# Altium PCB 56PCB-主板.pcbdoc
Units mm, origin at the board's own origin, x right, y up, seen from the top; angles counter-clockwise.
Board outline 72.36 x 47.63 mm, 2 copper layers (Top Layer, Bottom Layer); 82 components, 0 nets, 334 pads, 154 vias.
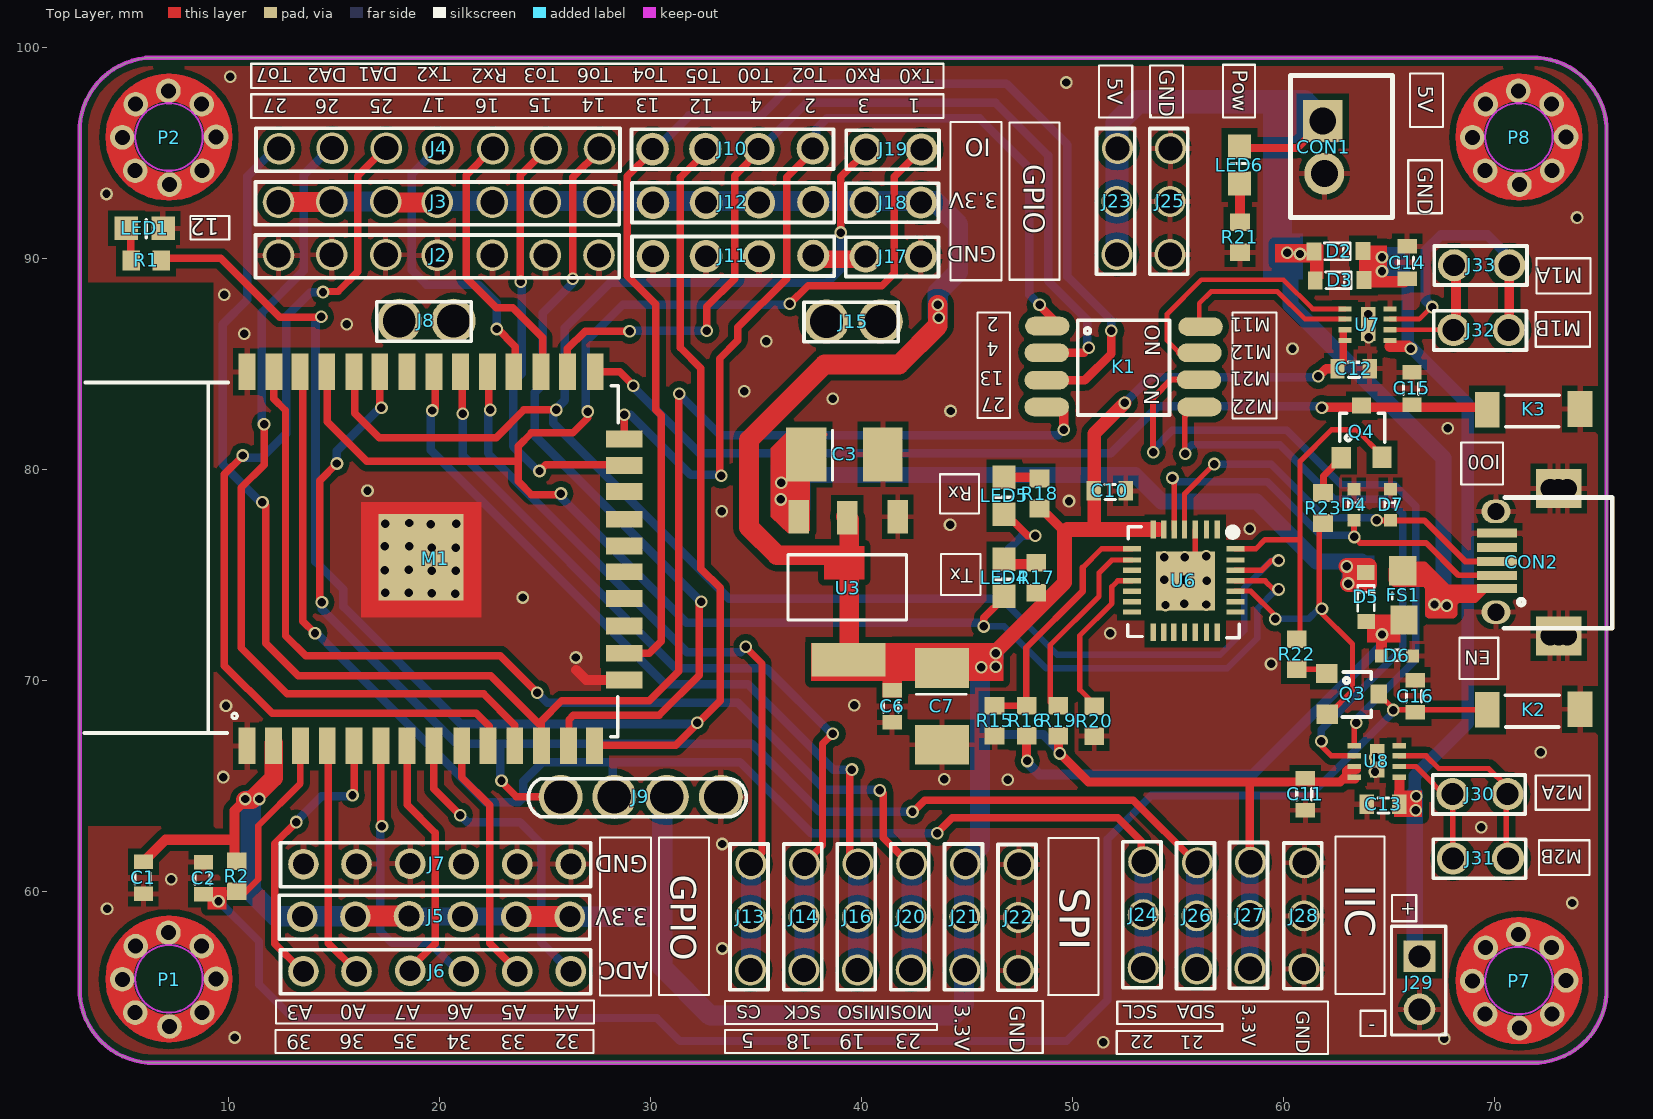
[diagram p0: Top Layer view]
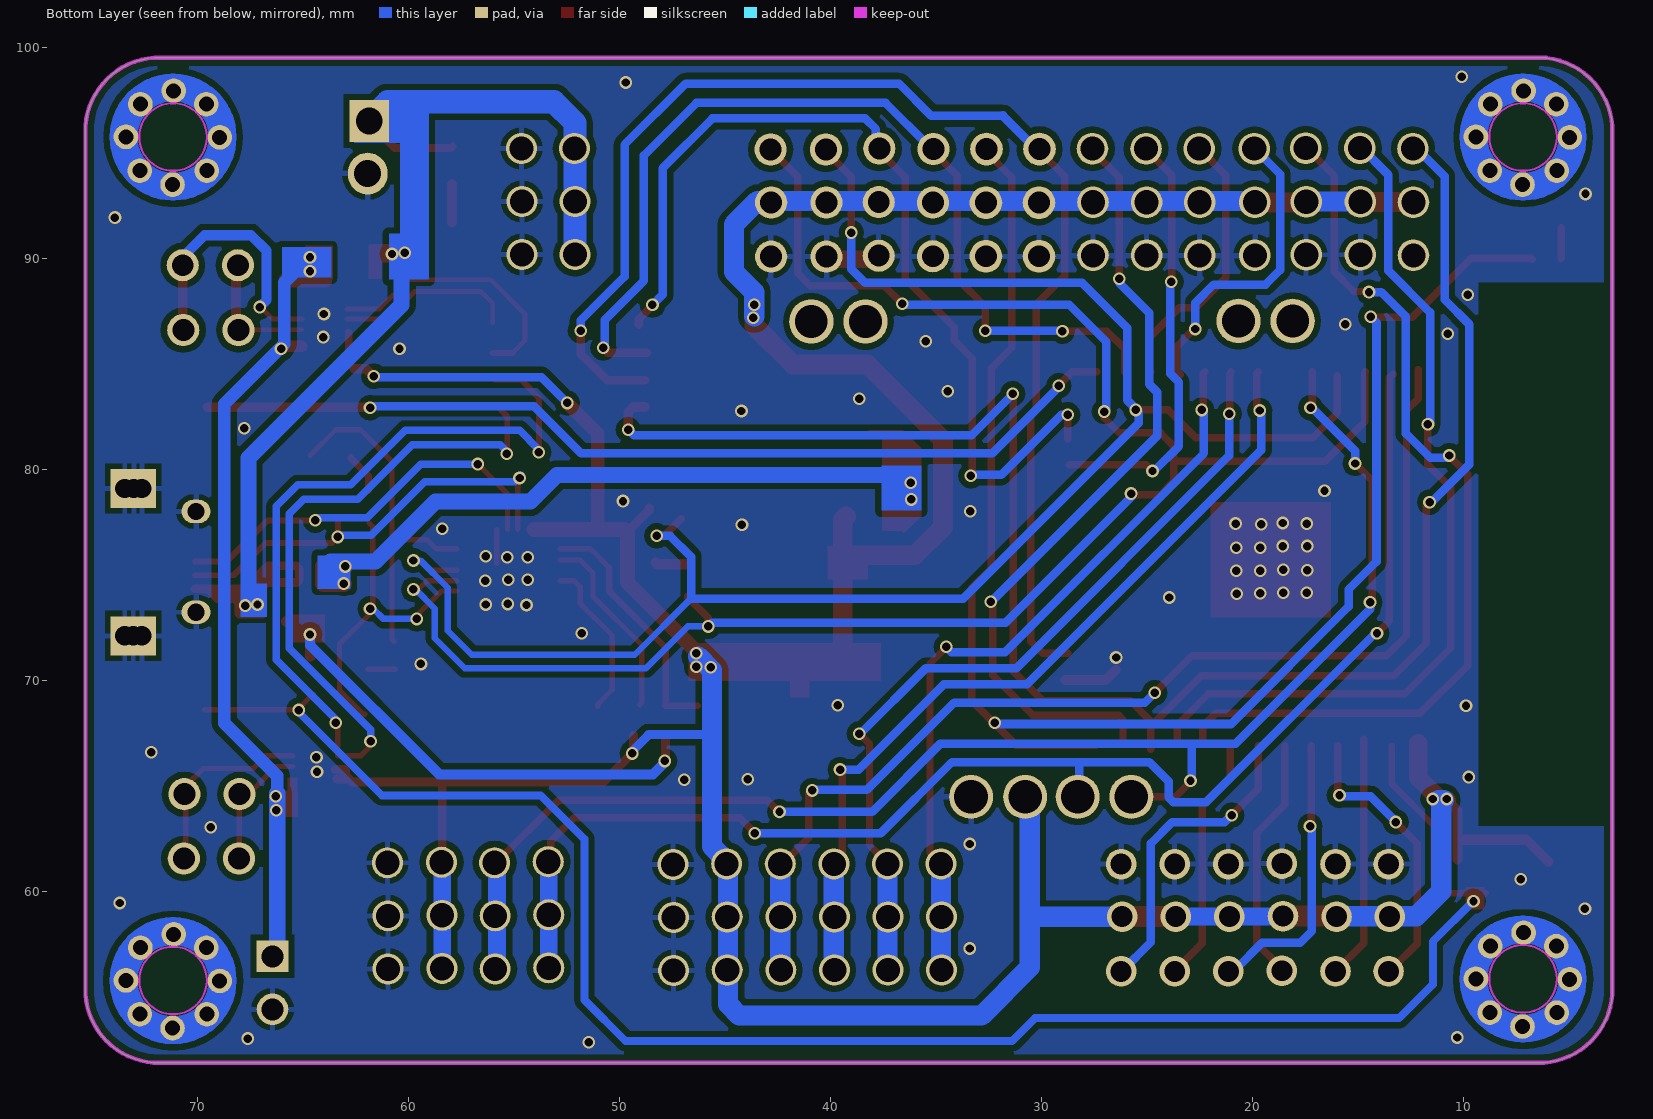
[diagram p1: Bottom Layer view, seen from below]

## Layer stack, top to bottom
Top Layer: signal copper 0.0356
Dielectric: dielectric 0.32, FR-4, Dk 4.8
Bottom Layer: signal copper 0.0356

## Board outline
2.95,55.111 2.95,96.285 2.95,96.288 cw(c6.429,96.031) 6.058,99.5 6.075,99.517 72.034,99.517 72.055,99.513 cw(c71.834,96.031) 75.313,96.288 75.313,96.285 75.313,55.112 75.313,55.108 cw(c71.834,55.365) 72.092,51.886 72.088,51.886 6.683,51.886 6.175,51.886 6.171,51.886 cw(c6.429,55.365)

## Design rules (kind name [scope] priority, off if disabled: settings)
Clearance [All] p1: gap=0.254
FanoutControl Fanout_Default [All] p1: bgadir=Out bgaviamode=Centered fanoutstyle=Auto fanoutdirection=Alternating viagrid=0.025 // Fanout_Default (Default Rule)
FanoutControl Fanout_Small [(CompPinCount < 5)] p2: bgadir=Out bgaviamode=Centered fanoutstyle=Auto fanoutdirection=OutThenIn viagrid=0.025 // Fanout_Small (Default Rule)
FanoutControl Fanout_LCC [IsLCC] p4: bgadir=Out bgaviamode=Centered fanoutstyle=Auto fanoutdirection=Alternating viagrid=0.025 // Fanout_LCC (Default Rule)
FanoutControl Fanout_BGA [IsBGA] p5: bgadir=Out bgaviamode=Centered fanoutstyle=Auto fanoutdirection=Alternating viagrid=0.025 // Fanout_BGA (Default Rule)
PolygonConnect [All] p1: connectstyle=Relief reliefconductorwidth=0.254 reliefentries=4 polygonreliefangle="90 Angle" airgapwidth=0.254
RoutingVias [All] p1: holewidth=0.711 width=1.27 viastyle="Through Hole" minholewidth=0.711 minwidth=1.27 maxholewidth=0.711 maxwidth=1.27
SolderMaskExpansion [All] p1: expansion=0.102
Width [All] p1: maxlimit=0.254 minlimit=0.254 preferedwidth=0.254
24 further rules are at their usual default settings.

## Components (designator, comment, footprint, x,y, rotation, side; value= is the part's Value field where it differs from the comment)
C1 "104" COMPONENT_13 5.972,60.649 r90 top
C2 "104" COMPONENT_13 8.817,60.623 r90 top
C3 "100UF/10V" COMPONENT_17 39.195,80.715 r180 top
C6 "104" COMPONENT_13 41.456,68.777 r90 top
C7 "100UF/10V" COMPONENT_17 43.818,68.777 r90 top
C10 "104" COMPONENT_13 51.768,78.987 r180 top
C11 "104" COMPONENT_13 61.039,64.611 r90 top
C12 "104" COMPONENT_13 63.325,84.779 r180 top
C13 "104" COMPONENT_13 64.722,64.128 r180 top
C14 "104" COMPONENT_13 65.865,89.808 r90 top
C15 "104" COMPONENT_13 66.094,83.839 r90 top
C16 "104" COMPONENT_13 66.246,69.259 r90 top
CON1 "XH2.54MM*2P直针插座" COMPONENT_24 61.903,95.269 r90 top
CON2 "安卓尾插牛角5针USB插座" COMPONENT_25 71.656,75.609 r90 top
D2 "S4" COMPONENT_21 62.614,90.341 r0 top
D3 "S4" COMPONENT_21 62.665,88.97 r0 top
D4 "NC" COMPONENT_22 63.35,78.327 r90 top
D5 "S4" COMPONENT_21 63.909,73.958 r90 top
D6 "NC" COMPONENT_22 65.382,71.164 r0 top
D7 "NC" COMPONENT_22 65.078,78.327 r90 top
FS1 "FS" COMPONENT_23 65.687,74.034 r90 top
J2 "2.54排针13P黑色" COMPONENT_4 19.967,90.163 r90 top
J3 "2.54排针13P红色" COMPONENT_4 19.967,92.678 r90 top
J4 "2.54排针13P黄色" COMPONENT_4 19.993,95.218 r90 top
J5 "2.54排针6P红色" COMPONENT_1 19.84,58.82 r90 top
J6 "2.54排针6P蓝色" COMPONENT_1 19.891,56.229 r90 top
J7 "2.54排针6P黑色" COMPONENT_1 19.891,61.309 r90 top
J8 "2P圆孔排母DS18B20" COMPONENT_5 19.383,87.039 r90 top
J9 "4P圆孔排母DS18B20" COMPONENT_2 29.543,64.484 r90 top
J10 "NC" COMPONENT_6 33.886,95.193 r90 top
J11 "NC" COMPONENT_6 33.912,90.113 r90 top
J12 "NC" COMPONENT_6 33.912,92.653 r90 top
J13 "2.54排针3P白色" COMPONENT_3 34.75,58.794 r90 top
J14 "2.54排针3P绿色" COMPONENT_3 37.29,58.794 r90 top
J15 "2P圆孔排母DS18B20" COMPONENT_5 39.627,87.014 r90 top
J16 "2.54排针3P蓝色" COMPONENT_3 39.83,58.794 r90 top
J17 "NC" COMPONENT_7 41.506,90.087 r90 top
J18 "NC" COMPONENT_7 41.506,92.653 r90 top
J19 "NC" COMPONENT_7 41.532,95.167 r90 top
J20 "2.54排针3P黄色" COMPONENT_3 42.37,58.794 r90 top
J21 "2.54排针3P红色" COMPONENT_3 44.91,58.794 r90 top
J22 "2.54排针3P黑色" COMPONENT_3 47.45,58.769 r90 top
J23 "2.54排针3P红色" COMPONENT_3 52.124,92.703 r90 top
J24 "2.54排针3P蓝色" COMPONENT_3 53.368,58.896 r90 top
J25 "2.54排针3P黑色" COMPONENT_3 54.638,92.703 r90 top
J26 "2.54排针3P黄色" COMPONENT_3 55.908,58.845 r90 top
J27 "2.54排针3P红色" COMPONENT_3 58.423,58.871 r90 top
J28 "2.54排针3P黑色" COMPONENT_3 60.988,58.845 r90 top
J29 "NC" COMPONENT_8 66.449,55.67 r90 top
J30 "2.54排针2P蓝色" COMPONENT_7 69.319,64.611 r90 top
J31 "2.54排针2P黄色" COMPONENT_7 69.345,61.563 r90 top
J32 "2.54排针2P黄色" COMPONENT_7 69.37,86.607 r90 top
J33 "2.54排针2P蓝色" COMPONENT_7 69.396,89.681 r90 top
K1 "贴片拨码开关（4位，1.25mm脚间距）" COMPONENT_18 52.428,84.88 r90 top
K2 "3*4*2MM按键按钮 2脚" COMPONENT_19 71.859,68.624 r90 top
K3 "3*4*2MM按键按钮 2脚" COMPONENT_19 71.859,82.848 r90 top
LED1 "LED蓝" COMPONENT_11 6.023,91.433 r90 top
LED4 "LED蓝" COMPONENT_11 46.764,74.873 r0 top
LED5 "LED蓝" COMPONENT_11 46.764,78.759 r0 top
LED6 "LED蓝" COMPONENT_11 57.915,94.431 r180 top
M1 "ESP32-WROOM-32DC （WIFI&蓝牙模块）" COMPONENT_9 20.043,75.762 r90 top
P1 "NC" COMPONENT_26 7.191,55.823 r90 top
P2 "NC" COMPONENT_26 7.191,95.726 r90 top
P7 "NC" COMPONENT_26 71.174,55.746 r90 top
P8 "NC" COMPONENT_26 71.174,95.726 r90 top
Q3 "Y1" COMPONENT_20 63.223,69.361 r90 top
Q4 "Y1" COMPONENT_20 63.706,81.731 r180 top
R1 "510R" COMPONENT_10 6.099,89.909 r90 top
R2 "100K" COMPONENT_10 10.391,60.725 r180 top
R15 "47K5" COMPONENT_10 46.307,68.091 r180 top
R16 "22K1" COMPONENT_10 47.831,68.091 r180 top
R17 "510R" COMPONENT_10 48.288,74.873 r180 top
R18 "510R" COMPONENT_10 48.441,78.86 r180 top
R19 "2K" COMPONENT_10 49.33,68.091 r180 top
R20 "10K" COMPONENT_10 51.031,68.065 r180 top
R21 "1K" COMPONENT_10 57.94,91.002 r180 top
R22 "10K" COMPONENT_10 60.633,71.24 r180 top
R23 "10K" COMPONENT_10 61.877,78.175 r180 top
U3 "AMS1117-3.3V" COMPONENT_14 39.373,74.365 r90 top
U6 "CP2102-GMR 贴片QFN-28" COMPONENT_15 55.273,74.72 r90 top
U7 "DRV8837DSGR" COMPONENT_16 63.985,86.861 r90 top
U8 "DRV8837DSGR" COMPONENT_16 64.417,66.16 r90 top

## Footprints (in the part's own frame and the unit in brackets; to place one, negate y for a bottom-side part, rotate by r counter-clockwise, add the part's x,y. Pads: shape width x height; smd on the part's side, far side on the other; paste and mask are expansions set on the pad)
COMPONENT_1 [mil]
  round 57.11 hole 39: 1(-0.5,-249.5) 2(-0.5,-149.5) 3(-0.5,-49.5) 4(0.5,50.5) 5(-0.5,150.5) 6(-0.5,249.5)
  silkscreen extent -43,-286 40,292
COMPONENT_2 [mil]
  round 82.11 hole 63: 1(0,149.5) 2(0,49.5) 3(0,-48.5) 4(0,-149.5)
  silkscreen extent -37,-197 34,210
COMPONENT_3 [mil]
  round 58 hole 45: 1(-99,0.5) 2(0,0.5) 3(99,-0.5)
  silkscreen extent -136,-33 136,39
COMPONENT_4 [mil]
  round 59 hole 45: 1(-0.5,299) 2(0.5,200) 3(0.5,99) 4(-0.5,3) 5(-0.5,-100) 6(-0.5,-199) 7(-0.5,-299)
  silkscreen extent -43,-337 38,342
COMPONENT_5 [mil]
  round 83 hole 61: 1(0,50.5) 2(0,-50.5)
  silkscreen extent -38,-84 36,92
COMPONENT_6 [mil]
  round 61 hole 41: 1(-0.25,149.25) 2(-0.25,50.25)
  round 60 hole 41: 3(-0.25,-48.75) 4(0.75,-149.75)
  silkscreen extent -37,-189 37,188
COMPONENT_7 [mil]
  round 60 hole 41: 1(0,51.5) 2(0,-51.5)
  silkscreen extent -37,-84 36,88
COMPONENT_8 [mil]
  rect 59x59 hole 41: 1(49.5,0)
  round 59 hole 41: 2(-49.5,0)
  silkscreen extent -98,-49 106,52
COMPONENT_9 [mil]
  rect 68x31.5 smd: 1(-349,361.13) 2(-349,311.13) 3(-349,261.13) 4(-349,211.13) 5(-349,161.13) 6(-349,111.13) 7(-349,62.13) 8(-349,12.13) 9(-349,-39.87) 10(-349,-88.87) 11(-349,-138.87) 12(-349,-188.87) 13(-349,-238.87) 14(-349,-287.87) 25(349,-288.87) 26(349,-236.87) 27(349,-187.87) 28(349,-136.87) 29(349,-87.87) 30(349,-37.87) 31(349,12.13) 32(349,62.13) 33(349,113.13) 34(349,161.13) 35(349,212.13) 36(349,262.13) 37(349,310.13) 38(349,361.13)
  rect 31.5x68 smd: 15(-226,-342.87) 16(-176,-342.87) 17(-125,-342.87) 18(-74,-342.87) 19(-24,-342.87) 20(24,-342.87) 21(74,-342.87) 22(126,-342.87) 23(174,-342.87) 24(224,-342.87)
  rect 161x159 smd: 39(3,36.13)
  silkscreen extent -332,-332 329,664
COMPONENT_10 [mil]
  rect 37x33 smd: 1(0,28) 2(0,-28)
COMPONENT_11 [mil]
  rect 43x44 smd: 1(0,34.5) 2(0,-34.5)
  silkscreen extent -18,-3 16,-3
COMPONENT_13 [mil]
  rect 27x36 smd: 1(30,0) 2(-30,0)
  silkscreen extent -11,-12 10,16
COMPONENT_14 [mil]
  rect 62x38 smd: 1(133.75,-92.5) 2(131.75,1.5) 3(133.75,92.5)
  rect 63x138 smd: 4(-133.25,-0.5)
  silkscreen extent -59,-108 63,112
COMPONENT_15 [mil]
  rect 33x10 smd: 1(96,-62.5) 2(96,-42.5) 3(96,-21.5) 4(96,-1.5) 5(96,17.5) 6(96,37.5) 7(96,56.5) 15(-96,56.5) 16(-96,37.5) 17(-96,18.5) 18(-96,-1.5) 19(-96,-21.5) 20(-96,-42.5) 21(-96,-62.5)
  rect 10x33 smd: 8(60,96.5) 9(39,96.5) 10(20,96.5) 11(0,96.5) 12(-19,96.5) 13(-39,96.5) 14(-58,96.5) 22(-58,-96.5) 23(-39,-96.5) 24(-19,-96.5) 25(0,-96.5) 26(20,-96.5) 27(39,-96.5) 28(60,-96.5)
  rect 110.24x110.24 smd: 29(0,-3.5)
  silkscreen extent -106,-104 101,104
COMPONENT_16 [mil]
  rect 9.84x25 smd: 1(29.5,42) 2(10.5,42) 3(-9.5,42) 4(-29.5,42) 5(-29.5,-42) 6(-9.5,-42) 7(10.5,-42) 8(29.5,-42)
  rect 62.84x27 smd: 9(1.5,-1)
COMPONENT_17 [mil]
  rect 74.84x101 smd: 1(71.25,0)
  rect 73.84x101 smd: 2(-71.75,0)
  silkscreen extent 22,-45 22,48
COMPONENT_18 [mil]
  oval 34.84x83 smd: 1(75.5,142.5) 2(25.5,143.5) 3(-25.5,143.5) 4(-75.5,143.5) 5(-75.5,-141.5) 6(-24.5,-140.5) 7(25.5,-141.5) 8(74.5,-143.5)
  silkscreen extent -91,-86 87,86
COMPONENT_19 [mil]
  rect 66.84x46 smd: 1(-0.5,86.5) 2(0.5,-86.5)
  silkscreen extent -32,-48 27,52
COMPONENT_20 [mil]
  rect 35.84x40 smd: 1(38,46) 2(-38,45)
  rect 35.84x30 smd: 3(0,-51)
  silkscreen extent -43,-37 41,17
COMPONENT_21 [mil]
  rect 27.84x33 smd: 1(-45.5,-0.5) 2(45.5,0.5)
  silkscreen extent -26,-16 22,16
COMPONENT_22 [mil]
  rect 23.84x24 smd: 1(-29,0) 2(29,0)
  silkscreen extent -9,-9 10,11
COMPONENT_23 [mil]
  rect 54.84x51 smd: 3(46,1) 4(-46,-1)
  silkscreen extent -8,-19 5,21
COMPONENT_24 [mil]
  rect 77.84x74 hole 50: 1(49,1.5)
  oval 77.84x74 hole 50: 2(-49,-1.5)
  silkscreen extent -131,-128 134,62
COMPONENT_25 [mil]
  rect 16.84x74 smd: 1(-49.5,60.25) 2(-24.5,60.25) 3(1.5,60.25) 4(27.5,60.25) 5(54.5,60.25)
  oval 43.84x54 hole 32: 6(-93.5,62.25) 7(94.5,62.25)
  rect 72.84x53 hole 36: 8(137.5,-38.75) 9(137.5,-70.75) 10(137.5,-53.75) 11(-137.5,-38.75) 12(-137.5,-70.75) 13(-137.5,-54.75)
  silkscreen extent -124,-155 121,47
COMPONENT_26 [mil]
  round 45.84 hole 28: 1(-61.5,63.5) 2(0.5,87.5) 3(62.5,62.5) 4(87.5,1.5) 5(62.5,-60.5) 6(1.5,-87.5) 7(-61.5,-61.5) 8(-87.5,-0.5)
  Top Layer circle w51.94: c1.08,0.5 r92.42
  Bottom Layer circle w51.94: c1.08,0.5 r92.42
  Keep-Out Layer circle w3.94: c1.37,0.5 r63.13

## Via types
v1: diameter 0.6, hole 0.4, Top Layer to Bottom Layer, tented both sides, 154 vias

## Nets (pads, with @x,y where several pads share a name; then routed paths per layer and width w, separated by ;. In a path a pad name is that pad's centre, name@x,y a point inside that pad or via, vN(x,y) a via of type N, cw(c..) or ccw(c..) an arc to the next point about the centre after c; other vN are vias at no path point)
pads on no net: C1.1 C1.2 C2.1 C2.2 C3.1 C3.2 C6.1 C6.2 C7.1 C7.2 C10.1 C10.2 C11.1 C11.2 C12.1 C12.2 C13.1 C13.2 C14.1 C14.2 C15.1 C15.2 C16.1 C16.2 CON1.1 CON1.2 CON2.1 CON2.2 CON2.3 CON2.4 CON2.5 CON2.6 CON2.7 CON2.8 CON2.9 CON2.10 CON2.11 CON2.12 CON2.13 D2.1 D2.2 D3.1 D3.2 D4.1 D4.2 D5.1 D5.2 D6.1 D6.2 D7.1 D7.2 FS1.3 FS1.4 J2.1 J2.2 J2.3 J2.4 J2.5 J2.6 J2.7 J3.1 J3.2 J3.3 J3.4 J3.5 J3.6 J3.7 J4.1 J4.2 J4.3 J4.4 J4.5 J4.6 J4.7 J5.1 J5.2 J5.3 J5.4 J5.5 J5.6 J6.1 J6.2 J6.3 J6.4 J6.5 J6.6 J7.1 J7.2 J7.3 J7.4 J7.5 J7.6 J8.1 J8.2 J9.1 J9.2 J9.3 J9.4 J10.1 J10.2 J10.3 J10.4 J11.1 J11.2 J11.3 J11.4 J12.1 J12.2 J12.3 J12.4 J13.1 J13.2 J13.3 J14.1 J14.2 J14.3 J15.1 J15.2 J16.1 J16.2 J16.3 J17.1 J17.2 J18.1 J18.2 J19.1 J19.2 J20.1 J20.2 J20.3 J21.1 J21.2 J21.3 J22.1 J22.2 J22.3 J23.1 J23.2 J23.3 J24.1 J24.2 J24.3 J25.1 J25.2 J25.3 J26.1 J26.2 J26.3 J27.1 J27.2 J27.3 J28.1 J28.2 J28.3 J29.1 J29.2 J30.1 J30.2 J31.1 J31.2 J32.1 J32.2 J33.1 J33.2 K1.1 K1.2 K1.3 K1.4 K1.5 K1.6 K1.7 K1.8 K2.1 K2.2 K3.1 K3.2 LED1.1 LED1.2 LED4.1 LED4.2 LED5.1 LED5.2 LED6.1 LED6.2 M1.1 M1.2 M1.3 M1.4 M1.5 M1.6 M1.7 M1.8 M1.9 M1.10 M1.11 M1.12 M1.13 M1.14 M1.15 M1.16 M1.17 M1.18 M1.19 M1.20 M1.21 M1.22 M1.23 M1.24 M1.25 M1.26 M1.27 M1.28 M1.29 M1.30 M1.31 M1.32 M1.33 M1.34 M1.35 M1.36 M1.37 M1.38 M1.39 P1.1 P1.2 P1.3 P1.4 P1.5 P1.6 P1.7 P1.8 P2.1 P2.2 P2.3 P2.4 P2.5 P2.6 P2.7 P2.8 P7.1 P7.2 P7.3 P7.4 P7.5 P7.6 P7.7 P7.8 P8.1 P8.2 P8.3 P8.4 P8.5 P8.6 P8.7 P8.8 Q3.1 Q3.2 Q3.3 Q4.1 Q4.2 Q4.3 R1.1 R1.2 R2.1 R2.2 R15.1 R15.2 R16.1 R16.2 R17.1 R17.2 R18.1 R18.2 R19.1 R19.2 R20.1 R20.2 R21.1 R21.2 R22.1 R22.2 R23.1 R23.2 U3.1 U3.2 U3.3 U3.4 U6.1 U6.2 U6.3 U6.4 U6.5 U6.6 U6.7 U6.8 U6.9 U6.10 U6.11 U6.12 U6.13 U6.14 U6.15 U6.16 U6.17 U6.18 U6.19 U6.20 U6.21 U6.22 U6.23 U6.24 U6.25 U6.26 U6.27 U6.28 U6.29 U7.1 U7.2 U7.3 U7.4 U7.5 U7.6 U7.7 U7.8 U7.9 U8.1 U8.2 U8.3 U8.4 U8.5 U8.6 U8.7 U8.8 U8.9
copper on no net: | length 1766.8
  Top Layer w0.202: 37.087,77.26 36.35,77.26 35.791,77.819 35.791,80.969 36.604,81.781 38.154,81.781 38.281,81.654
  Top Layer w0.227: 55.057,85.528 54.486,86.099 54.486,87.369 56.111,88.995 59.998,88.995 61.382,87.611 62.919,87.611 ; 56.01,86.938 56.01,87.877 56.569,88.436 59.718,88.436 61.026,87.128 62.919,87.128 ; 65.052,86.62 68.164,86.62 ; 65.052,87.128 66.436,87.128 v1@67.008,87.7
  Top Layer w0.252: 49.05,68.853 48.949,68.954 48.949,71.672 51.26,73.984 51.26,75.101 51.87,75.711 52.822,75.711 ; 50.498,75.355 51.387,76.244 52.822,76.244 ; 51.031,68.777 51.031,68.878 50.346,69.564 50.346,72.129 51.87,73.653 51.87,74.441 52.149,74.72 52.822,74.72 ; v1(54.74,79.597) 54.829,79.508 54.829,77.159 ; 55.311,77.159 55.311,78.848 v1(56.721,80.257) ; 55.819,75.546 55.819,77.159 ; 57.724,74.238 58.448,74.238 59.617,73.069 v1(59.617,72.917) ; 57.724,74.72 59.134,74.72 59.54,74.314 v1(59.769,74.314) ; 57.724,75.228 58.982,75.228 59.439,75.685 v1(59.769,75.685) ; 57.724,76.244 58.702,76.244 59.134,76.676 60.785,76.676 ; 60.633,70.529 61.928,70.529 ; 60.683,71.85 60.785,71.952 60.785,80.384 62.284,81.883 63.452,81.883 64.671,80.664 ; v1(61.801,67.126) 61.801,66.897 62.271,66.427 63.35,66.427 ; 61.877,77.463 61.699,77.286 61.699,73.298 63.274,71.723 63.274,69.539 62.131,68.396 62.08,68.396 ; 63.35,66.91 v1@63.35,67.888 ; 64.519,69.361 65.268,68.611 69.662,68.611 ; 65.484,65.919 66.284,65.919 68.024,64.179 68.024,61.563 ; 65.484,66.427 66.767,66.427 67.364,65.83 69.726,65.83 70.564,64.992 70.564,61.766
  Top Layer w0.278: v1(53.825,80.816) 53.825,83.407 54.689,84.271 55.908,84.271 ; 55.057,85.528 56.023,85.528 ; v1@55.324,80.664 55.324,82.518 55.629,82.823 ; 63.35,77.59 v1(63.35,76.803) 63.63,76.524 66.754,76.524 68.291,74.987 70.126,74.987 ; v1(64.417,77.59) 66.678,77.59 68.621,75.647 70.126,75.647
  Top Layer w0.303: 8.944,59.912 10.747,59.912 11.407,60.572 11.407,63.112 13.411,65.116 13.411,66.897 ; 47.831,68.802 47.806,68.827 47.806,71.545 50.498,74.238 50.498,75.355
  Top Layer w0.329: v1@34.521,71.571 35.283,70.809 35.283,61.83 34.763,61.309 ; 37.303,61.309 37.303,61.347 ; 46.307,68.802 47.831,68.802 ; 61.903,79.013 61.903,79.699 62.741,80.537 62.741,80.562
  Top Layer w0.354: 5.362,89.986 5.362,91.459 ; 6.734,89.96 6.785,90.011 9.629,90.011 12.423,87.217 v1@14.532,87.217 ; v1@10.671,80.638 9.807,79.775 9.807,70.707 12.068,68.446 21.745,68.446 22.355,67.837 22.355,67.049 ; v1(11.611,78.454) 11.763,78.302 11.763,71.774 13.312,70.224 22.431,70.224 24.819,67.837 24.819,66.745 ; v1(11.687,82.137) 11.687,80.232 10.595,79.14 10.595,71.545 12.779,69.361 22.101,69.361 23.574,67.888 23.574,66.973 ; 12.144,84.728 12.144,83.356 12.703,82.797 12.703,72.129 13.668,71.164 22.888,71.164 v1(24.641,69.412) ; v1(13.211,63.29) 12.195,62.274 12.195,57.524 13.389,56.331 ; 13.338,84.525 13.516,84.347 13.516,72.815 v1(14.1,72.231) ; v1@14.405,88.436 15.192,88.436 16.132,89.376 16.132,93.923 17.529,95.32 ; v1(14.43,73.704) 14.328,73.806 14.328,79.47 v1(15.141,80.283) ; 14.655,84.626 14.684,84.598 14.684,82.264 16.564,80.384 23.726,80.384 23.726,79.445 24.361,78.81 v1@25.708,78.81 ; 14.735,67.227 14.735,57.55 16.068,56.216 ; v1(15.878,64.56) 15.951,64.633 15.951,66.897 ; 15.979,84.448 15.979,82.67 17.148,81.502 22.685,81.502 24.006,82.823 v1(25.53,82.823) ; v1@17.17,83.004 17.17,84.626 ; v1@17.221,63.141 17.221,66.897 ; 18.465,66.897 18.465,64.106 19.789,62.782 19.789,57.524 18.672,56.407 ; v1(19.662,82.797) 19.789,82.924 19.789,84.572 19.735,84.626 ; 19.735,66.897 19.735,64.868 v1(20.983,63.62) ; 21.005,84.626 21.085,84.547 v1@21.085,82.67 ; 21.056,66.897 21.056,65.402 22.38,64.078 22.38,57.55 23.688,56.242 23.688,56.216 ; 22.275,84.626 22.329,84.572 22.329,82.899 v1(22.406,82.823) ; 22.507,95.193 21.263,93.948 21.263,89.097 22.685,87.674 23.472,87.674 24.895,86.252 24.895,84.706 24.815,84.626 ; v1@22.71,86.709 23.599,85.82 23.599,84.677 23.422,84.499 ; v1@22.939,65.195 23.65,64.484 25.746,64.484 ; 23.726,80.232 23.726,81.096 24.361,81.731 26.317,81.731 27.028,82.442 v1(27.028,82.747) ; v1(23.853,88.893) 23.828,88.919 23.828,93.948 24.971,95.091 25.073,95.091 ; v1(24.742,79.927) 25.047,80.232 28.679,80.232 ; 24.819,67.151 24.819,68.065 25.784,69.031 29.949,69.031 31.346,70.428 v1@31.346,83.585 ; 26.06,84.626 26.06,85.715 26.901,86.557 v1(29.01,86.557) ; 26.139,67.075 26.139,68.142 26.343,68.345 30.407,68.345 32.312,70.25 32.312,73.628 v1(32.413,73.73) ; v1(26.317,89.046) 26.317,93.846 27.587,95.116 ; 27.381,84.626 28.552,84.626 29.187,83.991 v1(29.187,83.966) ; 27.435,66.922 31.194,66.922 33.302,69.031 33.302,74.39 32.388,75.304 32.388,84.804 31.423,85.769 31.423,93.846 32.743,95.167 ; 28.752,71.291 29.949,71.291 30.508,71.85 30.508,82.569 30.254,82.823 30.254,87.827 28.908,89.173 28.908,93.897 30.095,95.085 ; 28.752,81.451 v1@28.752,82.591 ; v1(32.667,86.582) 32.667,87.725 33.988,89.046 33.988,93.923 35.258,95.193 35.258,95.269 ; v1(33.353,79.699) 33.277,79.775 33.277,85.261 34.14,86.125 34.14,86.734 36.452,89.046 36.452,93.846 37.722,95.116 ; v1(36.604,87.852) 37.468,88.716 40.973,88.716 41.557,89.3 41.557,93.872 42.878,95.193 42.929,95.193 ; 37.303,61.347 38.154,62.198 38.154,66.999 v1(38.636,67.481) ; v1@39.068,91.154 39.017,91.205 39.017,93.872 40.313,95.167 ; v1@39.449,65.678 39.449,61.715 39.779,61.385 ; v1@40.821,64.865 41.024,64.662 41.024,62.554 42.268,61.309 42.383,61.309 ; v1(42.421,63.773) 42.446,63.773 43.005,64.332 52.886,64.332 55.857,61.36 ; v1@43.64,62.833 44.3,63.493 52.149,63.493 53.267,62.376 53.267,61.385 ; v1(45.799,72.561) 45.799,72.968 46.764,73.933 46.764,73.996 ; 47.069,77.667 47.882,76.854 v1(48.237,76.854) ; 62.563,84.779 62.842,85.058 62.842,86.506
  Top Layer w0.379: 57.915,95.307 57.978,95.243 60.658,95.243 61.852,96.437
  Top Layer w0.405: v1(48.441,87.801) 48.441,87.776 49.101,87.115 49.101,86.861 ; 48.695,85.541 50.549,85.541 v1(50.777,85.769) ; 48.783,84.232 50.587,84.232 51.844,85.49 v1(51.844,86.582) ; 58.397,65.195 58.397,61.36 58.448,61.309 ; 69.637,74.352 69.535,74.352 69.065,73.882 68.253,73.882 68.049,73.679 68.049,73.171 68.024,73.145 66.906,73.145 66.906,74.441 66.703,74.644 65.281,74.644 65.179,74.746 65.179,75.279 65.332,75.431 66.678,75.431 67.757,74.352 70.126,74.352
  Top Layer w0.43: v1@47.831,66.237 47.831,67.38 ; 49.33,67.38 49.33,66.618 50.752,65.195 58.397,65.195 ; 57.661,65.195 62.69,65.195 62.995,65.5 62.995,65.703 63.071,65.779 63.452,65.779 ; 62.83,65.335 63.388,65.335 ; 70.678,86.798 70.704,86.823 70.704,89.681
  Top Layer w0.456: 46.764,79.635 48.58,79.635 ; 48.593,78.149 48.593,78.073 49.66,77.006 ; 48.783,82.962 49.342,82.962 49.584,82.721 v1(49.584,81.883) ; v1(61.649,84.423) 61.674,84.423 62.03,84.779 62.563,84.779 ; v1(61.826,82.924) 61.852,82.95 69.548,82.95
  Top Layer w0.481: 5.972,61.411 7.013,62.452 10.214,62.452 ; 10.29,61.512 10.29,63.824 v1@10.798,64.332 ; 26.47,70.504 26.952,70.021 28.883,70.021 ; 57.94,91.713 57.94,93.529 ; 68.075,86.531 68.176,86.633 68.176,89.592 68.087,89.681
  Top Layer w0.506: 46.84,75.508 48.212,75.508 48.288,75.584
  Top Layer w0.532: 64.646,71.164 64.646,72.206 65.23,72.79 65.789,72.79 ; 65.052,85.845 65.916,85.845 v1(66.043,85.718)
  Top Layer w0.557: 63.909,88.893 65.713,88.893 65.865,89.046
  Top Layer w0.633: 51.031,77.336 51.031,81.705 v1(52.479,83.153)
  Top Layer w0.71: v1@46.256,71.317 46.307,71.317 49.634,74.644 49.634,77.032 49.761,77.159 54.054,77.159
  Top Layer w0.786: v1(62.995,75.406) 64.036,75.406 64.036,74.593 v1(63.071,74.593) ; 63.198,74.974 63.681,74.974 63.757,74.898
  Top Layer w0.837: 37.773,89.96 40.211,89.96
  Top Layer w0.862: v1@10.798,64.332 11.103,64.332 12.144,65.373 12.144,67.024
  Top Layer w0.938: 12.347,92.678 15.09,92.678 ; 17.605,92.653 19.993,92.653 ; 39.271,77.768 39.424,77.616 39.424,71.164 ; 39.5,75.939 35.995,75.939 34.674,77.26 34.674,81.4 38.255,84.982 41.786,84.982 43.615,86.811 v1(43.615,87.801)
  Top Layer w0.989: 16.043,58.832 18.557,58.832 ; 23.637,58.807 26.177,58.807
  Bottom Layer w0.303: v1(45.799,72.561) 46.764,72.561 48.745,70.58 57.331,70.58 58.753,72.002 58.753,73.399 v1@59.667,74.314 ; 46.612,73.882 49.279,71.215 57,71.215 58.143,72.358 58.143,74.39 59.439,75.685 v1(59.769,75.685) ; v1(59.617,72.917) 61.191,72.917 61.649,73.374 v1@61.928,73.374
  Bottom Layer w0.354: v1(53.825,80.816) 53.825,80.943 54.74,81.858 60.15,81.858 62.741,79.267 65.255,79.267 66.271,78.251 66.271,70.986 63.452,68.167 v1(63.452,67.989) ; v1@54.664,79.724 54.968,79.419 59.236,79.419 61.776,76.879 63.274,76.879 v1(63.35,76.803) ; v1@55.299,80.816 55.654,81.172 59.82,81.172 62.411,78.581 64.976,78.581 65.662,77.895 65.662,71.52 61.801,67.659 v1(61.801,67.126) ; v1(56.721,80.257) 59.413,80.257 61.953,77.717 64.29,77.717 v1(64.417,77.59)
  Bottom Layer w0.379: v1@9.452,59.531 9.553,59.531 11.458,57.626 11.458,55.594 13.058,53.994 30.305,53.994 31.397,52.902 49.711,52.902 51.666,54.857 51.666,62.477 53.749,64.56 61.268,64.56 v1@65.205,68.497
  Bottom Layer w0.405: v1(10.671,80.664) 10.772,80.562 11.585,80.562 12.728,81.705 12.728,87.242 13.897,88.411 v1(14.481,88.411) ; v1(11.611,78.454) 11.509,78.454 9.731,80.232 9.731,86.887 10.899,88.055 10.899,93.897 12.207,95.205 ; v1(11.687,82.137) 11.585,82.239 11.585,87.446 13.566,89.427 13.566,93.973 14.913,95.32 ; v1(13.211,63.29) 13.211,63.316 14.405,64.509 15.827,64.509 v1(15.878,64.56) ; v1(14.1,72.231) 14.201,72.231 22.202,64.23 23.752,64.23 23.98,64.459 23.98,65.221 24.895,66.135 30.153,66.135 ; v1(14.405,87.242) 14.125,86.963 14.125,75.635 15.446,74.314 15.446,73.501 21.009,67.938 v1@32.108,67.938 ; v1(14.43,73.704) 14.43,73.374 20.805,66.999 34.801,66.999 38.027,63.773 42.319,63.773 v1@42.421,63.671 ; v1(15.141,80.283) 15.141,80.892 ; 15.408,81.159 15.141,80.892 ; v1@17.224,83.001 17.224,82.975 15.141,80.892 ; v1@17.3,63.163 17.199,63.062 17.199,58.109 17.732,57.575 19.535,57.575 20.78,56.331 21.059,56.331 ; v1@19.586,82.823 19.586,80.918 30.686,69.818 34.623,69.818 38.662,65.779 v1(39.551,65.779) ; 19.993,95.294 18.697,93.999 18.697,89.452 19.383,88.766 21.847,88.766 22.71,87.903 v1(22.71,86.658) ; v1(20.983,63.62) 21.313,63.29 23.803,63.29 24.819,62.274 24.819,57.601 26.203,56.216 26.228,56.216 ; v1(21.11,82.645) 21.11,80.664 31.194,70.58 35.487,70.58 v1@38.585,67.481 ; v1(22.406,82.823) 22.304,82.721 22.304,80.765 31.727,71.342 34.267,71.342 v1(34.521,71.596) ; 22.888,66.973 22.888,65.297 v1(22.939,65.246) ; v1(23.853,88.893) 23.904,88.843 23.904,84.55 23.498,84.144 23.498,81.096 24.666,79.927 v1(24.742,79.927) ; v1(24.641,69.412) 25.098,68.954 34.14,68.954 38.281,64.814 v1@40.795,64.814 ; v1(25.758,78.86) 25.758,78.683 31.702,72.739 45.621,72.739 v1(45.799,72.561) ; v1(26.317,89.046) 26.317,88.843 24.895,87.42 24.895,84.042 24.514,83.661 24.514,81.604 v1@32.388,73.73 ; v1(27.028,82.747) 26.927,82.848 26.927,86.049 28.679,87.801 v1@36.528,87.801 ; 28.222,64.382 28.222,65.983 ; v1(28.756,82.594) 29.06,82.594 31.905,79.749 33.302,79.749 v1(33.353,79.699) ; 28.933,66.135 34.242,66.135 37.62,62.757 v1(43.589,62.757) ; v1@29.035,86.582 v1(32.667,86.582) ; v1(29.187,83.966) 29.187,83.915 32.337,80.765 51.819,80.765 54.054,83.001 v1@61.75,83.001 ; v1@31.372,83.559 33.302,81.629 49.33,81.629 v1(49.584,81.883) ; 31.829,96.767 35.233,96.767 36.757,98.291 46.866,98.291 49.761,95.396 49.761,89.147 51.844,87.065 v1(51.844,86.582) ; 35.131,95.345 35.36,95.345 37.392,97.377 46.358,97.377 48.847,94.888 48.847,88.944 50.701,87.09 50.701,85.795 v1@50.803,85.693 ; 37.849,95.345 37.849,96.132 38.357,96.64 45.596,96.64 47.958,94.278 47.958,88.284 v1(48.441,87.801) ; v1(39.017,91.23) 39.017,89.503 38.357,88.843 28.07,88.843 25.936,86.709 25.936,83.28 25.403,82.747 25.403,82.188 33.709,73.882 46.612,73.882 46.612,75.863 47.602,76.854 v1(48.237,76.854) ; v1(52.479,83.153) 53.698,84.372 v1@61.572,84.372
  Bottom Layer w0.43: 30.095,95.186 30.248,95.186 31.829,96.767 ; 45.85,67.43 48.618,67.43 49.406,66.643 v1@49.406,66.465
  Bottom Layer w0.481: v1@47.856,66.11 48.415,65.551 58.55,65.551 64.671,71.672 v1(64.671,72.18) ; v1(67.059,87.7) 66.729,88.03 66.729,90.367 67.465,91.103 69.675,91.103 70.615,90.163 70.615,89.554
  Bottom Layer w0.608: 65.23,89.528 65.89,88.868 65.89,85.947 68.735,83.102 68.735,67.989 66.221,65.475 v1@66.221,64.662
  Bottom Layer w0.735: v1@60.175,90.062 60.328,89.909
  Bottom Layer w0.76: 36.909,79.749 52.962,79.749 54.232,78.479 58.728,78.479 61.572,75.635 63.706,75.635 61.699,75.635 ; 60.328,89.909 60.328,87.801 67.592,80.537 v1@67.592,73.577
  Bottom Layer w0.786: v1@66.221,64.662 66.221,57.156 66.449,56.927
  Bottom Layer w0.837: 53.355,56.381 53.355,61.385 ; 55.807,56.305 55.807,61.245 ; 58.41,56.356 58.41,61.525
  Bottom Layer w0.862: 18.583,58.807 23.637,58.807
  Bottom Layer w0.964: v1@11.179,64.332 10.925,64.332 11.052,64.205 11.052,60.014 12.246,58.82 16.132,58.82 ; 14.786,92.703 17.453,92.703 ; 19.993,92.729 43.462,92.729 44.58,91.611 44.58,89.376 43.615,88.411 v1@43.615,87.268 ; 26.177,58.807 30.521,58.807 ; 30.775,64.484 30.559,64.268 30.559,56.407 32.845,54.121 44.326,54.121 44.859,54.654 44.859,61.385 45.621,62.147 45.621,70.478 v1@46.282,71.139 ; 34.763,56.305 34.763,61.309 ; 37.303,56.318 37.303,61.309 ; 39.843,56.305 39.843,61.309 ; 42.383,56.305 42.383,61.309
  Bottom Layer w1.091: 52.111,90.189 52.111,96.424 53.114,97.428
  Bottom Layer w1.116: 53.114,97.428 60.988,97.428 61.801,96.615
  other v1: 51.463,52.851 67.618,53.029 10.29,53.079 33.404,57.296 4.245,59.175 73.688,59.455 9.528,59.531 7.293,60.572 33.404,62.249 69.37,63.036 17.275,63.087 66.271,63.849 10.798,64.382 11.458,64.382 66.297,64.509 40.871,64.789 46.942,65.297 43.919,65.322 9.756,65.424 64.341,65.678 47.856,66.186 64.366,66.364 49.406,66.541 72.19,66.592 32.21,67.989 65.205,68.599 9.883,68.802 39.652,68.827 45.672,70.631 46.358,70.656 59.413,70.783 26.47,71.088 46.358,71.291 51.793,72.231 61.826,73.399 67.745,73.552 54.41,73.577 56.34,73.603 67.16,73.603 55.299,73.628 23.955,73.933 20.755,74.111 19.637,74.136 17.427,74.161 18.545,74.161 56.365,74.72 54.359,74.771 55.273,74.771 19.637,75.203 20.78,75.203 17.402,75.228 18.545,75.254 54.359,75.838 55.324,75.838 56.34,75.889 19.637,76.295 20.78,76.295 17.402,76.371 18.57,76.371 58.397,77.184 44.199,77.387 19.586,77.413 17.427,77.438 20.805,77.438 18.57,77.463 33.378,78.022 49.838,78.505 36.172,78.581 16.589,78.987 36.198,79.368 55.349,80.74 67.795,81.959 44.224,82.772 17.249,82.924 38.636,83.356 31.372,83.585 34.445,83.712 60.429,85.718 35.487,86.074 64.036,86.277 10.747,86.43 15.598,86.887 43.665,87.192 64.011,87.369 9.807,88.284 64.671,89.401 64.671,90.062 60.785,90.214 60.175,90.265 73.917,91.941 4.219,93.059 49.711,98.342 10.087,98.622

## Polygon pours and split planes (outlines as drawn)
no net on Top Layer "GND-No Net" (solid, remove dead copper, pour order 14): 3,96.31 cw(c6.15,96.31) 6.15,99.46 72.037,99.46 cw(c72.037,96.234) 75.263,96.234 75.263,55.035 cw(c72.164,55.035) 72.164,51.936 6.404,51.936 cw(c6.404,55.34) 3,55.34
no net on Bottom Layer "GND-No Net" (solid, remove dead copper, pour order 15): 3,96.31 cw(c6.15,96.31) 6.15,99.46 72.037,99.46 cw(c72.037,96.234) 75.263,96.234 75.263,55.035 cw(c72.164,55.035) 72.164,51.936 6.404,51.936 cw(c6.404,55.34) 3,55.34

## Keep-outs
Keep-Out Layer:
  lines w0.1: 2.95,55.108 cw(c3,55.111) 2.95,55.111 ; 2.95,96.285 cw(c3,96.285) 2.95,96.288 ; 6.058,99.5 cw(c6.096,99.466) 6.096,99.517 ; 72.034,99.517 cw(c72.034,99.466) 72.055,99.513 ; 72.088,51.886 ccw(c72.088,51.936) 72.092,51.886 ; 75.313,55.108 ccw(c75.263,55.111) 75.313,55.111 ; 75.313,96.288 cw(c75.263,96.285) 75.313,96.285 ; 75.313,55.111 ccw(c75.263,55.111) 75.313,55.112
  lines w0.2: 6.096,99.517 ccw(c6.096,99.466) 6.058,99.5 ; 6.058,99.5 ccw(c6.429,96.031) 2.95,96.288 ccw(c3,96.285) 2.95,96.285 2.95,55.111 ccw(c3,55.111) 2.95,55.108 ccw(c6.429,55.365) 6.171,51.886 72.088,51.886 ccw(c72.088,51.936) 72.092,51.886 ccw(c71.834,55.365) 75.313,55.108 ccw(c75.263,55.111) 75.313,55.111 ; 6.058,99.5 6.075,99.517 72.034,99.517 cw(c72.034,99.466) 72.055,99.513 cw(c71.834,96.031) 75.313,96.288 cw(c75.263,96.285) 75.313,96.285 75.313,55.112 ; 6.058,99.5 6.058,99.5 ; 75.313,55.111 ccw(c75.263,55.111) 75.313,55.112

## Other copper
Top Layer:
  region: 37.201,77.65 36.363,78.462 35.69,77.768 36.528,76.955
  region: 36.48,80.215 37.369,81.028 36.68,81.781 35.791,80.969
  region: 36.782,77.819 36.782,80.994 35.791,80.994 35.791,77.819
  region: 37.569,77.082 37.569,81.565 36.388,81.565 36.388,77.082
  region: 61.903,89.02 61.903,90.671 61.268,90.671 61.268,89.02
  region: 61.826,89.808 61.826,90.697 59.591,90.697 59.591,89.808
  region: 64.9,88.995 64.9,90.621 63.579,90.621 63.579,88.995
  region: 66.513,74.86 67.389,73.984 67.757,74.352 66.881,75.228
  region: 69.091,73.933 69.091,74.238 68.176,74.238 68.176,73.933
  region: 68.253,73.145 68.253,74.352 66.983,74.352 66.983,73.145
  region: 66.881,74.644 66.881,75.381 66.094,75.381 66.094,74.644
  region: 65.56,71.799 65.56,73.12 63.96,73.12 63.96,71.799
  region: 66.576,63.519 66.576,64.789 65.23,64.789 65.23,63.519
  region: 65.738,63.773 65.738,65.398 65.255,65.398 65.255,63.773
  region: 41.913,69.183 41.913,70.326 40.998,70.326 40.998,69.183
  region: 46.739,69.97 46.739,71.774 37.62,71.774 37.62,69.97
  region: 40.135,74.796 40.135,76.371 38.23,76.371 38.23,74.796
  region: 9.909,59.15 9.909,60.217 8.994,60.217 8.994,59.15
  rectangle: 16.284,72.993 21.999,78.454
  pour cut-out: 2.949,63.087 9.299,63.087 9.299,88.868 2.949,88.868
Bottom Layer:
  region: 65.992,89.097 65.992,90.544 63.655,90.544 63.655,89.097
  region: 67.973,73.018 67.973,74.593 66.703,74.593 66.703,73.018
  region: 62.588,95.472 62.588,97.479 59.947,97.479 59.947,95.472
  region: 60.404,91.078 60.404,97.199 59.032,97.199 59.032,91.078
  region: 60.937,88.995 60.937,91.179 59.032,91.179 59.032,88.995
  region: 64.316,74.339 64.316,75.914 62.741,75.914 62.741,74.339
  region: 37.595,78.048 37.595,80.181 35.69,80.181 35.69,78.048
  pour cut-out: 2.949,63.087 9.299,63.087 9.299,88.868 2.949,88.868

## Silkscreen, mask and mechanical layers (free items; w line width, h text height)
Top Overlay:
  lines w0.1: 8.207,90.9 8.207,92.018 10.036,92.018 10.036,90.9 8.258,90.9 ; 11.077,96.691 11.077,97.783 43.894,97.783 43.894,96.666 11.077,96.666 11.077,96.742 ; 12.22,52.343 12.22,53.435 27.308,53.435 27.308,52.343 12.246,52.343 ; 43.767,74.06 43.767,75.99 45.647,75.99 45.647,74.06 43.792,74.06 ; 45.545,82.442 47.044,82.442 47.044,87.446 45.494,87.446 45.494,82.442 45.621,82.442 ; 48.847,55.086 51.235,55.086 51.235,62.528 48.872,62.528 48.872,55.086 ; 51.26,96.691 51.26,99.155 52.835,99.155 52.835,96.691 51.285,96.691 ; 52.098,52.292 52.098,53.384 57.102,53.384 57.102,53.714 52.124,53.714 52.124,54.781 62.106,54.781 62.106,52.292 52.124,52.292 ; 53.673,96.691 53.673,99.155 55.248,99.155 55.248,96.691 53.724,96.691 53.724,96.793 ; 57.127,96.691 57.127,99.18 58.651,99.18 58.651,96.691 57.153,96.691 ; 57.585,82.416 57.585,87.446 59.667,87.446 59.667,82.416 57.61,82.416 ; 63.655,53.156 63.655,54.349 64.824,54.349 64.824,53.156 63.706,53.156 ; 65.992,96.234 65.992,98.774 67.567,98.774 67.567,96.234 66.043,96.234 ; 68.43,79.292 68.43,81.273 70.412,81.273 70.412,79.292 68.456,79.292 ; 71.961,63.874 71.961,65.5 74.501,65.5 74.501,63.874 71.986,63.874 ; 71.961,85.82 71.961,87.471 74.526,87.471 74.526,85.82 71.986,85.82 ; 71.986,88.335 71.986,90.011 74.552,90.011 74.552,88.335 72.012,88.335 ; 72.113,60.776 72.113,62.427 74.501,62.427 74.501,60.776 72.139,60.776 ; 11.077,98.088 43.894,98.088 43.894,99.231 11.077,99.231 11.077,98.088 ; 12.246,53.74 27.333,53.74 27.333,54.832 12.246,54.832 12.246,53.74 ; 27.613,55.061 30.026,55.061 30.026,62.554 27.613,62.554 27.613,55.061 ; 30.407,55.086 32.769,55.086 32.769,62.554 30.407,62.554 30.407,55.086 ; 33.531,52.343 48.593,52.343 48.593,54.807 33.531,54.807 33.531,53.714 43.589,53.714 43.589,53.435 33.531,53.435 33.531,52.343 ; 43.716,77.921 45.57,77.921 45.57,79.775 43.716,79.775 43.716,77.921 ; 44.224,88.97 46.637,88.97 46.637,96.463 44.224,96.463 44.224,88.97 ; 47.018,88.995 49.38,88.995 49.38,96.437 47.018,96.437 47.018,88.995 ; 62.461,55.137 64.798,55.137 64.798,62.604 62.461,62.604 62.461,55.137 ; 65.154,58.591 66.297,58.591 66.297,59.836 65.154,59.836 65.154,58.591 ; 65.916,92.145 67.516,92.145 67.516,94.659 65.916,94.659 65.916,92.145 ; 68.354,70.072 70.183,70.072 70.183,72.028 68.354,72.028 68.354,70.072
  text "DA1" at 18.011,99.053 h0.66 r180
  text "Tx2" at 20.526,99.053 h0.66 r180
  text "To7" at 12.982,99.028 h0.66 r180
  text "DA2" at 15.598,99.028 h0.66 r180
  text "To3" at 25.657,99.028 h0.66 r180
  text "To6" at 28.197,99.028 h0.66 r180
  text "To4" at 30.788,99.028 h0.66 r180
  text "To2" at 38.357,99.028 h0.66 r180
  text "Rx2" at 23.218,99.003 h0.66 r180
  text "To0" at 35.791,99.003 h0.66 r180
  text "Rx0" at 40.948,99.003 h0.66 r180
  text "To5" at 33.302,98.977 h0.66 r180
  text "Tx0" at 43.437,98.977 h0.66 r180
  text "GND" at 54.105,98.952 h0.71 r270
  text "Pow" at 57.61,98.952 h0.71 r270
  text "5V" at 51.666,98.571 h0.71 r270
  text "5V" at 66.398,98.19 h0.71 r270
  text "17" at 20.297,97.606 h0.66 r180
  text "15" at 25.352,97.606 h0.66 r180
  text "14" at 27.892,97.606 h0.66 r180
  text "13" at 30.432,97.606 h0.66 r180
  text "4" at 35.309,97.606 h0.66 r180
  text "27" at 12.779,97.58 h0.66 r180
  text "16" at 22.837,97.58 h0.66 r180
  text "2" at 37.849,97.58 h0.66 r180
  text "3" at 40.389,97.58 h0.66 r180
  text "1" at 42.776,97.58 h0.66 r180
  text "26" at 15.243,97.555 h0.66 r180
  text "25" at 17.808,97.555 h0.66 r180
  text "12" at 32.972,97.555 h0.66 r180
  text "IO" at 46.129,95.675 h0.84 r180
  text "GPIO" at 47.704,94.456 h0.99 r270
  text "GND" at 66.373,94.329 h0.71 r270
  text "3.3V" at 46.485,93.11 h0.74 r180
  text "12" at 9.553,91.916 h0.79 r180
  text "GND" at 46.383,90.57 h0.74 r180
  text "M1A" at 74.196,89.554 h0.74 r180
  text "2" at 46.51,87.217 h0.66 r180
  text "M11" at 59.388,87.192 h0.66 r180
  text "M1B" at 74.145,87.039 h0.74 r180
  text "4" at 46.51,86.023 h0.66 r180
  text "M12" at 59.439,85.896 h0.66 r180
  text "13" at 46.739,84.652 h0.66 r180
  text "M21" at 59.388,84.626 h0.66 r180
  text "27" at 46.815,83.407 h0.66 r180
  text "M22" at 59.49,83.305 h0.66 r180
  text "IO0" at 70.285,80.664 h0.66 r180
  text "Rx" at 45.24,79.191 h0.66 r180
  text "Tx" at 45.266,75.304 h0.66 r180
  text "EN" at 69.827,71.418 h0.66 r180
  text "M2A" at 74.222,65.017 h0.66 r180
  text "M2B" at 74.171,61.969 h0.66 r180
  text "GND" at 29.873,61.715 h0.79 r180
  text "GPIO" at 30.965,60.801 h1.22 r270
  text "IIC" at 62.919,60.318 h1.42 r270
  text "SPI" at 49.406,60.166 h1.42 r270
  text "3.3V" at 29.873,59.201 h0.79 r180
  text "+" at 65.535,58.896 h0.64
  text "ADC" at 29.924,56.635 h0.79 r180
  text "3.3V" at 58.042,54.68 h0.64 r270
  text "A0" at 16.538,54.629 h0.69 r180
  text "A6" at 21.593,54.629 h0.69 r180
  text "3.3V" at 44.427,54.629 h0.71 r270
  text "A3" at 13.998,54.603 h0.69 r180
  text "A7" at 19.078,54.603 h0.69 r180
  text "A5" at 24.133,54.603 h0.69 r180
  text "A4" at 26.622,54.603 h0.69 r180
  text "CS" at 35.258,54.603 h0.64 r180
  text "SCL" at 54.054,54.603 h0.64 r180
  text "SDA" at 56.772,54.603 h0.64 r180
  text "SCK" at 38.103,54.578 h0.64 r180
  text "MOSIMISO" at 43.386,54.578 h0.64 r180
  text "GND" at 47.018,54.578 h0.71 r270
  text "GND" at 60.607,54.349 h0.64 r270
  text "-" at 64.036,53.41 h0.64
  text "5" at 34.928,53.283 h0.71 r180
  text "23" at 42.827,53.257 h0.71 r180
  text "36" at 16.462,53.232 h0.69 r180
  text "35" at 18.977,53.232 h0.69 r180
  text "32" at 26.647,53.232 h0.69 r180
  text "18" at 37.671,53.232 h0.71 r180
  text "19" at 40.186,53.232 h0.71 r180
  text "39" at 13.947,53.206 h0.69 r180
  text "34" at 21.542,53.206 h0.69 r180
  text "33" at 24.082,53.206 h0.69 r180
  text "22" at 53.851,53.181 h0.64 r180
  text "21" at 56.213,53.156 h0.64 r180

## Text inside footprints (layer, text, board x,y; h text height)
K1: Top Overlay "NO" at 54.117,83.039 h0.71 r90; Top Overlay "NO" at 54.168,85.375 h0.71 r90